# EAGLE board microzed_sd_v0.5_r1.1-default.2d2790e7 (EAGLE 7.7.0)
REVISION: R1.1; VERSION: V0.5
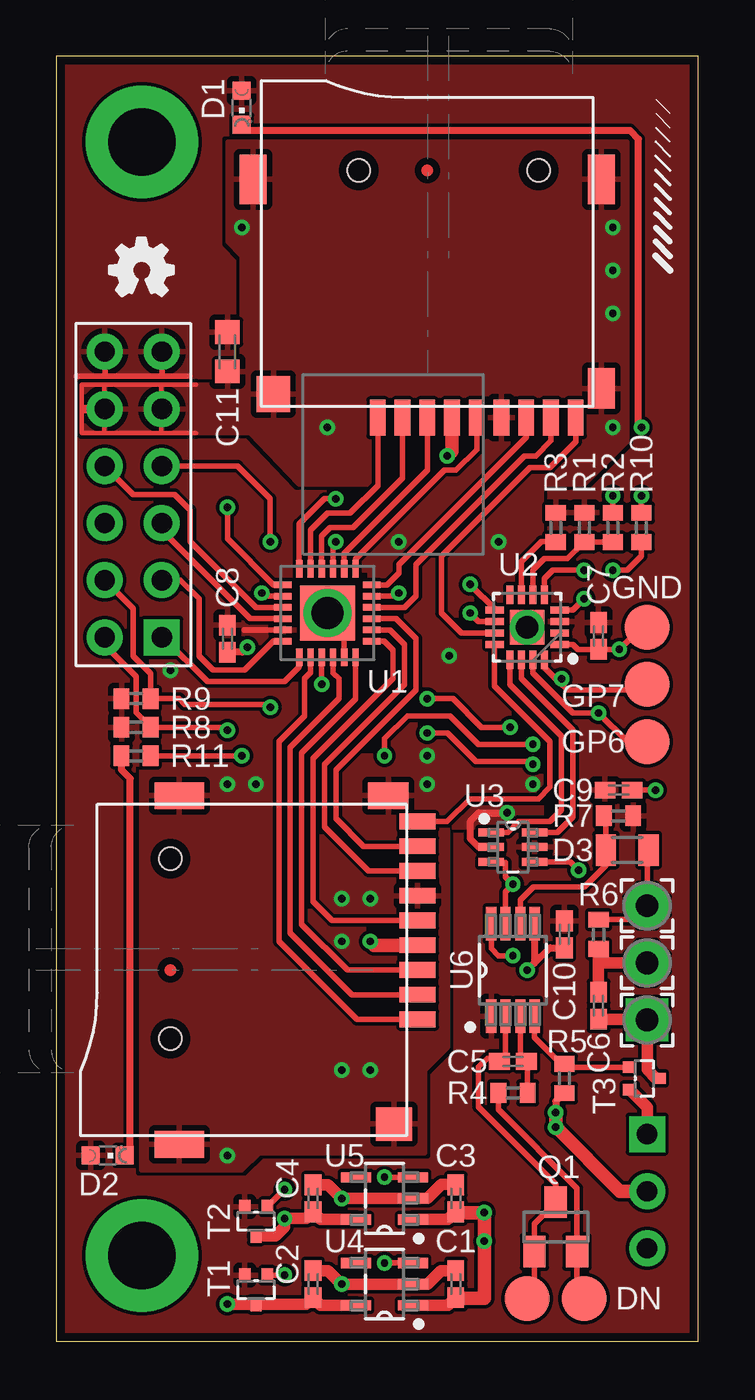
[diagram p0: board, top side]
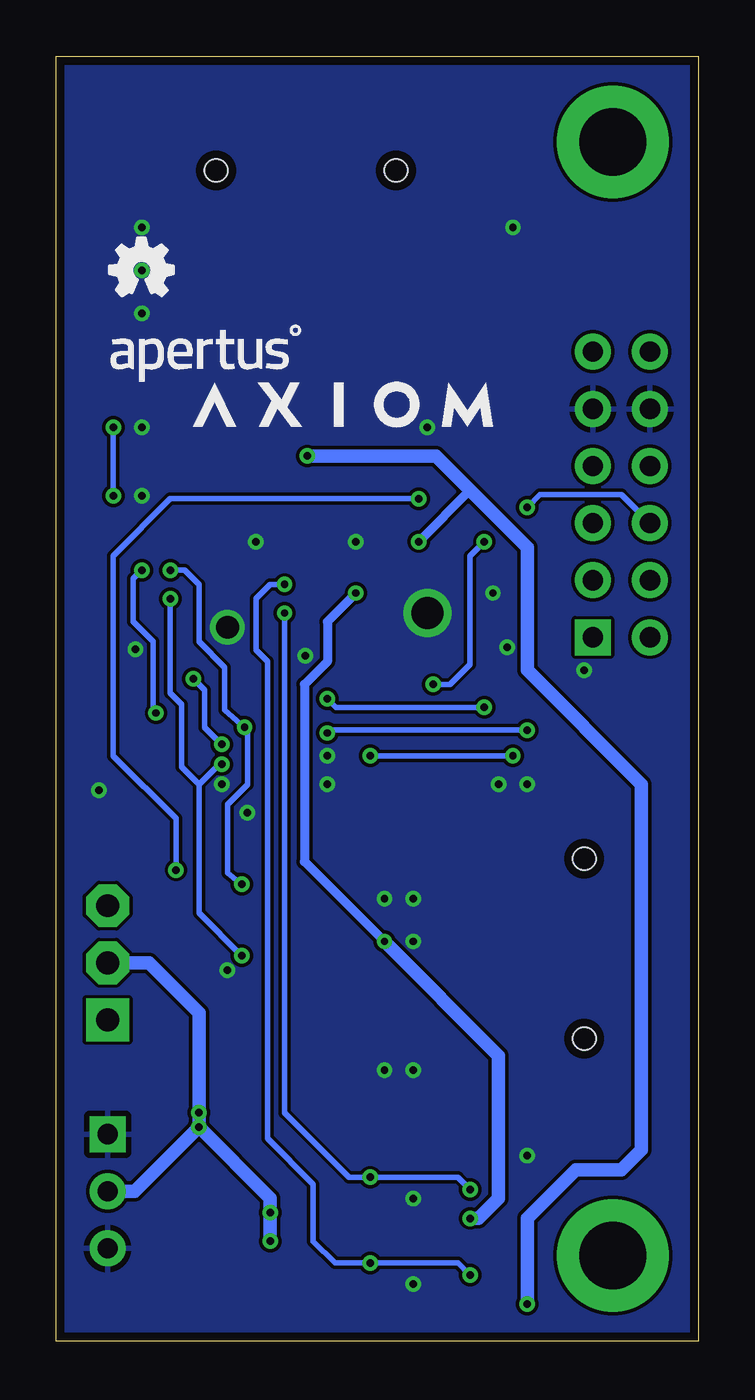
[diagram p1: board, bottom side, seen from below]

Size 28.57 x 57.15 mm. Coordinates in mm from the lower left corner, seen from the top.
Outline: 0,0 28.57,0 28.57,57.15 0,57.15 0,0
Copper layers (1*16): Top 0.0356mm / dielectric 1.5011mm / Bottom 0.0356mm
Design rules "OSHPark-2layer-tuned *": minimum track width 6mil, minimum drill 13mil, track to track 6mil, track to pad 6mil, pad to pad 6mil, via to via 6mil, smd to smd 6mil, copper to edge 15mil, drill to drill 6mil, minimum pad ring 7mil, minimum via ring 7mil, stop-mask expansion 2mil, vias tented up to drill 15mil, thermal gap 10mil
Net classes: 1 LVDS: width 0.305 mm, drill 0.305 mm, clearance 0.152 mm
tKeepout: area 1.3,1.3 to 6.3,6.3; area 1.3,50.8 to 6.3,55.8
tRestrict: area 4.5,16 to 5.6,17.1; area 16,51.5 to 17.1,52.6

## Footprints (pad centres in the part's own frame; a part is rotated, then mirrored left to right if it is on the bottom)
C0402K = smd 0.925 x 0.74: 1 -0.6,0; 2 0.6,0
C0603K = smd 1.05 x 1.08: 1 -0.875,0; 2 0.875,0
CHIPLED_0603 = smd 0.8 x 0.8: A 0,-0.75; C 0,0.75
MICROMELF-W = smd 0.9 x 1.4: A 0.95,0; C -0.95,0
TP20R = smd 2 x 2: TP 0,0
1,85/1,0_SQ = drill 1.016 pad 1.905 square: 1 0,0
SOT23 = smd 1 x 1.4: 1 -0.95,-1.1; 2 0.95,-1.1; 3 0,1.1
R0402 = smd 0.7 x 0.9: 1 -0.65,0; 2 0.65,0
SOT416 = smd 0.5 x 0.6: 1 -0.5,-0.65; 2 0.5,-0.65; 3 0,0.65
1,85/1,0 = drill 1.016 pad 1.905 octagon: 1 0,0
µZ-TOP-NOHOLES = drill 0.9 pad 1.6 square: J5-1 4.699,31.305; JP4-1 26.289,9.207 | drill 0.9 pad 1.6: J5-2 4.699,33.846; J5-3 4.699,36.386; J5-4 4.699,38.925; J5-5 4.699,41.465; J5-6 4.699,44.005; J5-7 2.159,31.305; J5-8 2.159,33.846; J5-9 2.159,36.386; J5-10 2.159,38.925; J5-11 2.159,41.465; J5-12 2.159,44.005; JP4-2 26.289,6.668; JP4-3 26.289,4.128
S-PWQFN-N24 = smd 0.78 x 0.28: 1 -1.975,1.25; 2 -1.975,0.75; 3 -1.975,0.25; 4 -1.975,-0.25; 5 -1.975,-0.75; 6 -1.975,-1.25; 13 1.975,-1.25; 14 1.975,-0.75; 15 1.975,-0.25; 16 1.975,0.25; 17 1.975,0.75; 18 1.975,1.25 | smd 0.28 x 0.78: 7 -1.25,-1.975; 8 -0.75,-1.975; 9 -0.25,-1.975; 10 0.25,-1.975; 11 0.75,-1.975; 12 1.25,-1.975; 19 1.25,1.975; 20 0.75,1.975; 21 0.25,1.975; 22 -0.25,1.975; 23 -0.75,1.975; 24 -1.25,1.975 | smd 2.45 x 2.45: EPAD 0,0
QFN50P300X300X80-17N = smd 0.813 x 0.305: 1 -1.448,0.762; 2 -1.448,0.254; 3 -1.448,-0.254; 4 -1.448,-0.762; 9 1.448,-0.762; 10 1.448,-0.254; 11 1.448,0.254; 12 1.448,0.762 | smd 0.305 x 0.813: 5 -0.762,-1.448; 6 -0.254,-1.448; 7 0.254,-1.448; 8 0.762,-1.448; 13 0.762,1.448; 14 0.254,1.448; 15 -0.254,1.448; 16 -0.762,1.448 | smd 1.549 x 1.549: EP 0,0
SOT65P210X110-6N = smd 1.118 x 0.356: 1 -0.965,0.66; 2 -0.965,0; 3 -0.965,-0.66; 4 0.965,-0.66; 5 0.965,0; 6 0.965,0.66
SOT95P275X110-5N = smd 1.321 x 0.457: 1 -1.27,0.94; 2 -1.27,0; 3 -1.27,-0.94; 4 1.27,-0.94; 5 1.27,0.94
SOP65P490X110-8N = smd 1.499 x 0.457: 1 -2.057,0.965; 2 -2.057,0.33; 3 -2.057,-0.33; 4 -2.057,-0.965; 5 2.057,-0.965; 6 2.057,-0.33; 7 2.057,0.33; 8 2.057,0.965
TF-MICRO-SD_PP3 = smd 0.7 x 1.6: 1 2.2,11; 2 1.1,11; 3 0,11; 4 -1.1,11; 5 -2.2,11; 6 -3.3,11; 7 -4.4,11; 8 -5.5,11; CD -6.6,11 | smd 1.2 x 2.2: MT1 -7.75,0.4; MT2 7.75,0.4 | smd 1.2 x 1.8: MT3 -7.75,9.7 | smd 1.5 x 1.6: MT4 6.85,9.95 | hole 1: -4.95,0; 3.05,0

## Placement (x,y rotation side)
C1  1µ  [C0402K]  17.78,2.54 90 top
C2  1µ  [C0402K]  11.43,2.54 90 top
C3  1µ  [C0402K]  17.78,6.35 90 top
C4  1µ  [C0402K]  11.43,6.35 90 top
C5  2n2  [C0402K]  20.32,12.45 180 top
C6  1µ  [C0402K]  24.13,14.92 270 top
C7  100n  [C0402K]  24.13,31.37 270 top
C8  100n  [C0402K]  7.62,31.24 270 top
C9  100n  [C0402K]  25.02,24.51 0 top
C10  100n  [C0402K]  22.61,18.1 270 top
C11  10µ  [C0603K]  7.62,44.01 270 top
D1  [CHIPLED_0603]  8.26,54.86 180 top
D2  [CHIPLED_0603]  2.29,8.26 270 top
D3  [MICROMELF-W]  25.4,21.84 180 top
DN  TPTP20R  [TP20R]  23.5,1.91 0 top
DP  TPTP20R  [TP20R]  20.95,1.91 0 top
GND  TPTP20R  [TP20R]  26.29,31.75 0 top
GP6  TPTP20R  [TP20R]  26.29,26.67 0 top
GP7  TPTP20R  [TP20R]  26.29,29.21 0 top
LOGO1  OSHW_LOGO_FILLX0100-NT  [OSHW_FILLX100_NOTEXT]  26.19,46.51 0 bottom
LOGO2  OSHW_LOGO_FILLX0100-NT  [OSHW_FILLX100_NOTEXT]  2.39,46.51 0 top
PWM  [1,85/1,0_SQ]  26.29,14.29 0 top
Q1  [SOT23]  22.23,5.08 0 top
R1  [R0402]  23.5,36.2 90 top
R2  [R0402]  24.77,36.2 270 top
R3  10k  [R0402]  22.23,36.2 90 top
R4  100R  [R0402]  20.32,11.05 180 top
R5  2k2  [R0402]  22.61,11.68 90 top
R6  10k  [R0402]  24.13,18.1 90 top
R7  10k  [R0402]  25.02,23.37 180 top
R8  [R0402]  3.56,27.3 180 top
R9  [R0402]  3.56,28.57 180 top
R10  [R0402]  26.04,36.2 90 top
R11  [R0402]  3.56,26.04 180 top
T1  PMR670UPE  [SOT416]  8.89,2.29 180 top
T2  PMR670UPE  [SOT416]  8.89,5.33 180 top
T3  PMR290UNE  [SOT416]  26.16,11.68 270 top
TACH  [1,85/1,0]  26.29,19.37 0 top
U0  µZ-PMOD-NOHOLES  [µZ-TOP-NOHOLES]  0,0 0 top
U1  TXS02612  [S-PWQFN-N24]  12.06,32.38 0 top
U2  MCP23009-E/MG  [QFN50P300X300X80-17N]  20.95,31.75 180 top
U3  74LVC1G98DW-7  [SOT65P210X110-6N]  20.32,21.97 0 top
U4  LD6836TD/30P  [SOT95P275X110-5N]  14.61,2.54 180 top
U5  LD6836TD/30P  [SOT95P275X110-5N]  14.61,6.35 180 top
U6  EMC2101-ACZL  [SOP65P490X110-8N]  20.32,16.51 90 top
U$1  APERTUS_LOGO334X100  [APERTUS_LOGO_334X100]  26.16,42.67 0 bottom
U$13  AXIOM_LOGO525X80  [AXIOM_LOGO_525X80]  22.48,40.64 0 bottom
VDD  [1,85/1,0]  26.29,16.83 0 top
µSD0  MICRO-SD3  [TF-MICRO-SD_PP3]  16.51,52.07 180 top
µSD1  MICRO-SD3  [TF-MICRO-SD_PP3]  5.08,16.51 270 top

## Library data of the parts
C1-C11 R1-R11 = rcl
D1 D2 = led
D3 = diode
DN DP GND GP6 GP7 = testpad
LOGO1 LOGO2 = ohw-logo
PWM TACH VDD = wirepad
Q1 = semicon-smd-ipc
T1-T3 = transistor
U0 = microzed
U1 = TXS02612
U2 = mcp23009
U3 = 74lvc1g98; MPN: 74LVC1G98DW-7; OC_FARNELL: 1893843; OC_NEWARK: 47T3929; PACKAGE: SOT-6; SUPPLIER: DIODES INC.
U4 U5 = ld6836; MPN: LD6836TD/30P; OC_FARNELL: 2308335; OC_NEWARK: 69W9605; PACKAGE: TSOP-5; SUPPLIER: NXP
U6 = emc2101; MPN: EMC2101-ACZL-TR; OC_FARNELL: 2361961; OC_NEWARK: 12X8574; PACKAGE: MSOP-8; SUPPLIER: MICROCHIP
U$1 U$13 = logos_apertus_axiom
µSD0 µSD1 = micro-sd

## Nets
A_CLK: U0.J5-4 U1.9
A_CMD: U0.J5-3 U1.4
A_DAT0: U0.J5-2 U1.6
A_DAT1: U0.J5-1 U1.7
A_DAT2: U0.J5-9 U1.1
A_DAT3: U0.J5-10 U1.3
B0_CLK: U1.19 µSD0.5
B0_CMD: U1.20 µSD0.3
B0_DAT0: U1.18 µSD0.7
B0_DAT1: U1.16 µSD0.8
B0_DAT2: U1.23 µSD0.1
B0_DAT3: U1.22 µSD0.2
B1_CLK: U1.13 µSD1.5
B1_CMD: U1.12 µSD1.3
B1_DAT0: U1.14 µSD1.7
B1_DAT1: U1.15 µSD1.8
B1_DAT2: U1.8 µSD1.1
B1_DAT3: U1.10 µSD1.2
CD0: U2.11 µSD0.CD
CD1: U2.12 µSD1.CD
DN: DN.TP Q1.2 R4.2
DP: C5.2 DP.TP Q1.1 Q1.3 U6.2
FAN: C6.2 PWM.1 T3.3
GND: C1.2 C2.2 C3.2 C4.2 C7.2 C8.2 C9.2 C10.2 C11.2 GND.TP R2.1 T3.2 U0.J5-5 U0.J5-11 U0.JP4-1 U0.JP4-3 U1.2 U1.11 U1.EPAD U2.1 U3.2 U4.2 U5.2 U6.5 µSD0.6 µSD0.MT1 µSD0.MT2 µSD0.MT3 µSD0.MT4 µSD1.6 µSD1.MT1 µSD1.MT2 µSD1.MT3 µSD1.MT4
GP6: GP6.TP R10.1 U2.15
GP7: GP7.TP R11.1 U2.16
N$1: U2.13 U3.1
N$2: U2.14 U3.6
N$3: R1.1 R2.2 U2.6
N$4: R3.1 U2.7
N$5: D1.C R10.2
N$6: D2.C R11.2
N$8: C5.1 R4.1 U6.3
N$12: R5.2 T3.1 U6.4
N$13: D3.A R7.2 U6.6
PWR0: T1.1 U2.9 U4.3
PWR1: T2.1 U2.10 U5.3
SCL: R8.1 U0.J5-7 U2.4 U6.8
SDA: R9.1 U0.J5-8 U2.5 U3.3 U6.7
SEL: U1.24 U3.4
TACH: D3.C R6.2 TACH.1
VCC: C7.1 C8.1 C9.1 C10.1 C11.1 D1.A D2.A R1.2 R3.2 R7.1 R8.2 R9.2 T1.2 T2.2 U0.J5-6 U0.J5-12 U1.5 U2.3 U3.5 U6.1
VCC0: C2.1 T1.3 U1.21 U4.5 µSD0.4
VCC1: C4.1 T2.3 U1.17 U5.5 µSD1.4
VDD: C1.1 C3.1 C6.1 R5.1 R6.1 U0.JP4-2 U4.1 U5.1 VDD.1

## Tracks (layer width: path | path; a pad name or v marks a point on that pad's centre or on a via)
A_CLK  (via drill 0.33)
  Top 0.254: U1.9 11.81,29.34 v11.81,29.21 | v9.53,35.56 9.53,37.47 8.06,38.92 U0.J5-4
  Bottom 0.254: v9.53,35.56 10.16,34.92 10.16,30.1 11.05,29.21 v11.81,29.21
A_CMD
  Top 0.254: U1.4 8.63,32.13 4.7,36.07 U0.J5-3
A_DAT0
  Top 0.254: U0.J5-2 5.52,33.85 6.35,33.02 6.35,30.48 6.99,29.84 8.38,29.84 9.67,31.14 U1.6
A_DAT1
  Top 0.254: U1.7 10.81,29.99 10.16,29.34 6.73,29.34 4.76,31.3 U0.J5-1
A_DAT2  (via drill 0.33)
  Top 0.254: U1.1 9.67,33.63 7.62,35.69 v7.62,37.08
  Bottom 0.254: U0.J5-9 3.43,37.66 7.05,37.66 v7.62,37.08
A_DAT3
  Top 0.254: U1.3 8.89,32.63 5.97,35.56 5.97,36.96 5.27,37.66 3.43,37.66 U0.J5-10
B0_CLK
  Top 0.254: U1.19 13.31,34.78 17.27,38.73 17.78,38.73 18.71,39.66 µSD0.5
B0_CMD
  Top 0.254: µSD0.3 16.51,38.73 12.81,35.04 U1.20
B0_DAT0
  Top 0.254: U1.18 14.71,33.63 15.24,34.16 15.24,34.54 20.91,40.21 µSD0.7
B0_DAT1
  Top 0.254: U1.16 15.49,32.63 16,33.15 16,34.54 20.83,39.37 21.34,39.37 22.01,40.04 µSD0.8
B0_DAT2
  Top 0.254: µSD0.1 14.31,38.06 13.08,36.83 12.06,36.83 11.31,36.08 U1.23
B0_DAT3
  Top 0.254: µSD0.2 15.41,38.4 13.21,36.2 12.19,36.2 11.81,35.82 U1.22
B1_CLK
  Top 0.254: µSD1.5 12.28,18.71 11.43,19.56 11.43,25.91 14.99,29.46 14.99,30.73 14.59,31.14 U1.13
B1_CMD
  Top 0.254: µSD1.3 12.95,16.51 10.92,18.54 10.92,26.16 13.31,28.55 U1.12
B1_DAT0
  Top 0.254: µSD1.7 13.89,20.91 11.94,22.86 11.94,25.65 15.49,29.21 15.49,30.99 14.85,31.64 U1.14
B1_DAT1
  Top 0.254: µSD1.8 13.68,22.01 12.45,23.24 12.45,25.4 16,28.96 16,31.24 15.11,32.13 U1.15
B1_DAT2
  Top 0.254: µSD1.1 13.38,14.31 9.91,17.78 9.91,26.67 11.05,27.81 11.05,29.46 11.31,29.73 U1.8
B1_DAT3
  Top 0.254: µSD1.2 13.16,15.41 10.41,18.16 10.41,26.42 12.57,28.57 12.57,29.46 12.32,29.72 U1.10
CD0
  Top 0.254: U2.11 18.03,31.5 17.14,32.38 17.14,34.92 21.08,38.86 21.97,38.86 23.11,40 µSD0.CD
CD1
  Top 0.254: µSD1.CD 17.39,23.11 18.41,24.13 21.46,24.13 21.97,24.64 21.97,26.67 19.51,29.13 U2.12
DN
  Top 0.254: DN.TP 23.18,2.23 Q1.2 23.18,6.8 19.67,10.3 R4.2
DP
  Top 0.254: U6.2 19.99,12.34 C5.2 19.18,12.57 18.8,12.19 18.8,10.41 22.23,6.99 Q1.3 21.27,5.23 Q1.1 21.27,2.23 DP.TP
FAN
  Top 0.254: 26.67,11.7 T3.3
  Top 0.508: 26.67,11.7 26.29,12.08 PWM.1 26.29,14.32 C6.2
GND  (via drill 0.33, 1.02, 1.42)
  Top 0.203: 6.22,40.39 4.67,40.39 | 4.67,40.39 2.13,40.39 | 2.13,40.39 1.14,40.39 1.14,41.38 | 1.14,41.38 1.14,41.55 | 1.14,41.55 1.14,42.55 2.13,42.55 | 2.13,42.55 4.67,42.55 | 4.67,42.55 6.22,42.55 | 4.67,40.39 4.67,42.55 | 2.13,40.39 2.13,41.38 | 2.13,41.38 2.13,41.55 | 2.13,41.55 2.13,42.55 | 2.13,41.55 1.14,41.55 | 2.13,41.38 1.14,41.38 | 12.81,31.36 12.94,31.48 12.94,31.51
  Top 0.254: U1.11 12.81,31.36 | U1.2 9.28,33.13 v9.14,33.27 | 12.94,31.51 12.83,31.62 | R2.1 v24.77,37.59 | U2.1 22.99,30.99 23.21,30.77 C7.2 v25.05,30.77 26.04,31.75 GND.TP | C9.2 v26.67,24.51
  Top 0.305: U3.2 18.8,21.97 18.43,22.34 18.43,23.13 18.8,23.5 v20.07,23.5 | 21.29,16.82 U6.5 21.29,18.7 | 21.29,16.82 v20.95,16.51 | 21.29,16.82 21.97,17.5 C10.2 | v8.51,30.86 8.29,30.64 C8.2 | U1.EPAD 12.83,31.62
  Top 0.508: C1.2 17.11,3.14 16.51,2.54 U4.2 v12.7,2.54 12.1,3.14 C2.2 | C3.2 17.75,6.99 17.14,6.99 16.51,6.35 U5.2 v12.7,6.35 12.1,6.95 C4.2 | U0.JP4-1 26.29,10.41 T3.2
  other vias: 16.51,24.77 7.62,8.26 7.62,24.77 24.77,49.53 24.77,40.64 12.06,32.38 8.26,49.53 15.24,35.56 19.68,35.56 17.49,30.48 21.21,24.77 13.97,19.68 12.7,19.68 24.77,47.62 24.77,45.72 12.06,40.64 13.97,12.06 5.08,29.84 12.7,17.78 20.95,31.75 8.89,24.77 16.51,26.04 12.7,12.06
  pour Bottom: 0,57.15 28.57,57.15 28.57,0 0,0
  pour Top (rank 2): 3.81,26.04 17.4,26.04 17.4,13.08 16.38,12.06 16.38,8.38 9.02,8.38 8.26,7.62 3.81,7.62
  pour Top (rank 2): 25.4,53.34 25.4,40.01 23.5,38.1 10.79,38.1 8.64,40.39 1.27,40.39 1.27,42.55 7.24,42.55 8.26,43.56 8.26,48.26 7.62,48.9 7.62,53.34
  pour Top (rank 2): 21.59,40.01 21.59,22.86 17.14,22.86 17.14,26.04 3.81,26.04 3.81,31.11 5.08,31.11 6.99,29.21 13.97,29.21 13.97,34.29 12.7,34.29 12.7,40.01
GP6  (via drill 0.33)
  Top 0.254: U2.15 21.21,29.72 22.99,27.94 v24.13,27.94 25.4,26.67 GP6.TP | R10.1 26.04,34.92 25.4,34.29 v24.77,34.29
  Bottom 0.254: v24.77,34.29 25.15,33.91 25.15,32 24.26,31.11 24.26,28.07 v24.13,27.94
GP7  (via drill 0.33)
  Top 0.254: v22.48,29.46 22.35,29.34 | 22.35,29.34 22.73,28.96 26.04,28.96 GP7.TP | v21.21,26.54 18.8,26.54 17.53,27.81 15.62,27.81 14.61,26.8 v14.61,26.04 | v8.26,26.04 R11.1 | 22.35,29.34 21.72,29.97 U2.16
  Bottom 0.254: v14.61,26.04 v8.26,26.04 | v21.21,26.54 21.97,27.3 21.97,28.96 v22.48,29.46
N$1
  Top 0.254: U3.1 20.09,22.63 20.57,23.11 21.97,23.11 22.48,23.62 22.48,26.92 20.19,29.21 U2.13
N$2
  Top 0.254: U3.6 22.3,22.63 22.99,23.32 22.99,27.18 20.7,29.46 U2.14
N$3
  Top 0.254: R2.2 R1.1 22.75,34.8 21.72,34.8 21.21,34.29 U2.6
N$4
  Top 0.254: U2.7 20.7,34.67 21.59,35.56 22.21,35.56 R3.1
N$5  (via drill 0.33)
  Top 0.254: R10.2 v26.04,37.59
  Top 0.305: D1.C 8.52,53.85 25.53,53.85 25.91,53.47 25.91,40.77 v26.04,40.64
  Bottom 0.254: v26.04,37.59 v26.04,40.64
N$6
  Top 0.305: D2.C 3.3,8.65 3.3,25.02 2.91,25.41 R11.2
N$8
  Top 0.254: U6.3 20.65,12.34 C5.1 20.97,12.52 R4.1
N$12
  Top 0.254: U6.4 21.29,13.51 22.59,12.21 R5.2 22.76,12.18 T3.1
N$13
  Top 0.254: U6.6 20.65,19.63 21.22,20.21 23.5,20.21 24.45,21.16 D3.A 24.45,23.32 R7.2
NC1  (via drill 3 pad 5)
  other vias: 3.81,3.81
NC2  (via drill 3 pad 5)
  other vias: 3.81,53.34
PWR0  (via drill 0.33)
  Top 0.254: T1.1 v10.16,2.94 | U2.9 19.56,32.51 v18.41,33.66 | U4.3 v14.61,3.48
  Bottom 0.254: v18.41,33.66 19.05,33.66 19.68,33.02 19.68,30.73 19.18,30.23 19.18,9.02 17.14,6.99 17.14,4.45 16.18,3.48 v14.61,3.48 10.7,3.48 v10.16,2.94
PWR1  (via drill 0.33)
  Top 0.254: T2.1 v10.16,6.75 | U2.10 18.8,32 v18.41,32.38 | U5.3 v14.61,7.29
  Bottom 0.254: v18.41,32.38 18.41,10.16 15.54,7.29 v14.61,7.29 10.7,7.29 v10.16,6.75
SCL  (via drill 0.33)
  Top 0.254: v16.51,27.05 17.4,27.05 18.67,25.78 21.08,25.78 v21.21,25.65 | U6.8 19.36,17.48 19.68,17.14 v20.32,17.14 | v23.5,33.02 22.99,32.51 U2.4 | v7.62,27.18 7.49,27.3 R8.1 3.56,27.95 3.56,29.56 2.16,30.96 U0.J5-7
  Bottom 0.254: v7.62,27.18 16.38,27.18 v16.51,27.05 | v20.32,17.14 22.23,19.05 22.23,24.77 | 22.23,24.77 21.34,25.65 v21.21,25.65 | 22.23,24.77 22.99,25.53 22.99,28.32 23.5,28.83 v23.5,33.02
SDA  (via drill 0.33)
  Top 0.254: v16.51,28.57 17.65,28.57 18.92,27.3 v20.19,27.3 | U6.7 19.99,19.99 v20.32,20.32 19.99,20.65 19.99,21.29 U3.3 | v9.53,28.19 9.4,28.32 5.71,28.32 5.46,28.57 R9.1 4.21,29.7 3.43,30.48 3.43,32.58 U0.J5-8 | v23.5,34.29 22.1,34.29 21.72,33.91 U2.5
  Bottom 0.254: v9.53,28.19 16.13,28.19 v16.51,28.57 | v20.32,20.32 20.95,20.83 20.95,23.88 20.07,24.77 20.07,27.18 v20.19,27.3 21.08,28.07 21.08,29.97 22.23,31.11 22.23,33.66 22.86,34.29 v23.5,34.29
SEL  (via drill 0.33)
  Top 0.254: U1.24 10.81,36.34 11.94,37.47 v12.45,37.47 | U3.4 22.89,21.31 v23.24,20.95
  Bottom 0.254: v12.45,37.47 23.5,37.47 26.04,34.92 26.04,26.04 23.24,23.24 v23.24,20.95
TACH
  Top 0.254: D3.C 26.29,22.03 TACH.1 25.67,18.75 R6.2
VCC
  Top 0.254: U1.5 8.37,31.64 | 5.97,42.93 4.71,42.93 | 4.71,42.93 2.17,42.93 | 2.17,42.93 0.89,42.93 | 2.17,42.93 2.17,44.07 | 4.71,42.93 4.71,44.07
  pour Top (rank 3): 0,57.15 28.57,57.15 28.57,0 0,0
VCC0  (via drill 0.33)
  Top 0.254: v12.45,35.56 12.31,35.43 U1.21
  Top 0.508: U4.5 11.77,1.6 C2.1 | C2.1 11.38,1.89 | v7.62,1.65 8.9,1.64 T1.3 11.13,1.64 C2.1
  Top 0.61: µSD0.4 17.61,39.58 v17.4,39.37
  Bottom 0.406: v12.45,35.56 10.16,37.85
  Bottom 0.61: v17.4,39.37 11.68,39.37 10.16,37.85 7.62,35.31 7.62,29.84 2.54,24.77 2.54,8.51 3.43,7.62 5.46,7.62 7.62,5.46 v7.62,1.65
VCC1  (via drill 0.33)
  Top 0.254: U1.17 15.1,33.13 v15.24,33.27
  Top 0.508: U5.5 11.77,5.41 C4.1 | C4.1 11.38,5.7 | T2.3 9.76,4.68 10.16,5.08 v10.16,5.46 11.14,5.46 C4.1
  Top 0.61: v13.97,17.78 14.14,17.61 µSD1.4
  Bottom 0.406: v15.24,33.27 16.51,32 16.51,30.23 17.53,29.21 17.53,21.34 v13.97,17.78
  Bottom 0.61: v10.16,5.46 9.78,5.46 8.89,6.35 8.89,12.7 v13.97,17.78
VDD  (via drill 0.33)
  Top 0.305: R5.1 22.46,10.91 22.23,10.67 v22.23,10.16
  Top 0.508: U5.1 17.44,5.41 C3.1 | U4.1 17.44,1.6 C1.1 | C6.1 24.13,16.83 | 24.13,16.83 R6.1 | VDD.1 24.13,16.83
  Top 0.61: C3.1 17.82,5.71 v19.05,5.71 19.05,1.91 17.82,1.91 C1.1 | v22.23,10.16 v22.23,9.53 25.08,6.67 U0.JP4-2
  Bottom 0.61: v22.23,9.53 v22.23,10.16 22.23,14.61 24.45,16.83 VDD.1 | v22.23,9.53 25.08,6.67 U0.JP4-2 | v22.23,9.53 19.05,6.35 v19.05,5.71 v19.05,4.45
(copper drawn outside any net)
  shapes: Top circle x2

## Text on the board
_bSilk: PMOD SD/FAN ADAPTER | Copyright (C) 2014 H.Poetzl / Licensed under CERN OHL v.1.2